# EAGLE board D&N_Electronics_Design_v29 (EAGLE 9.7.0)
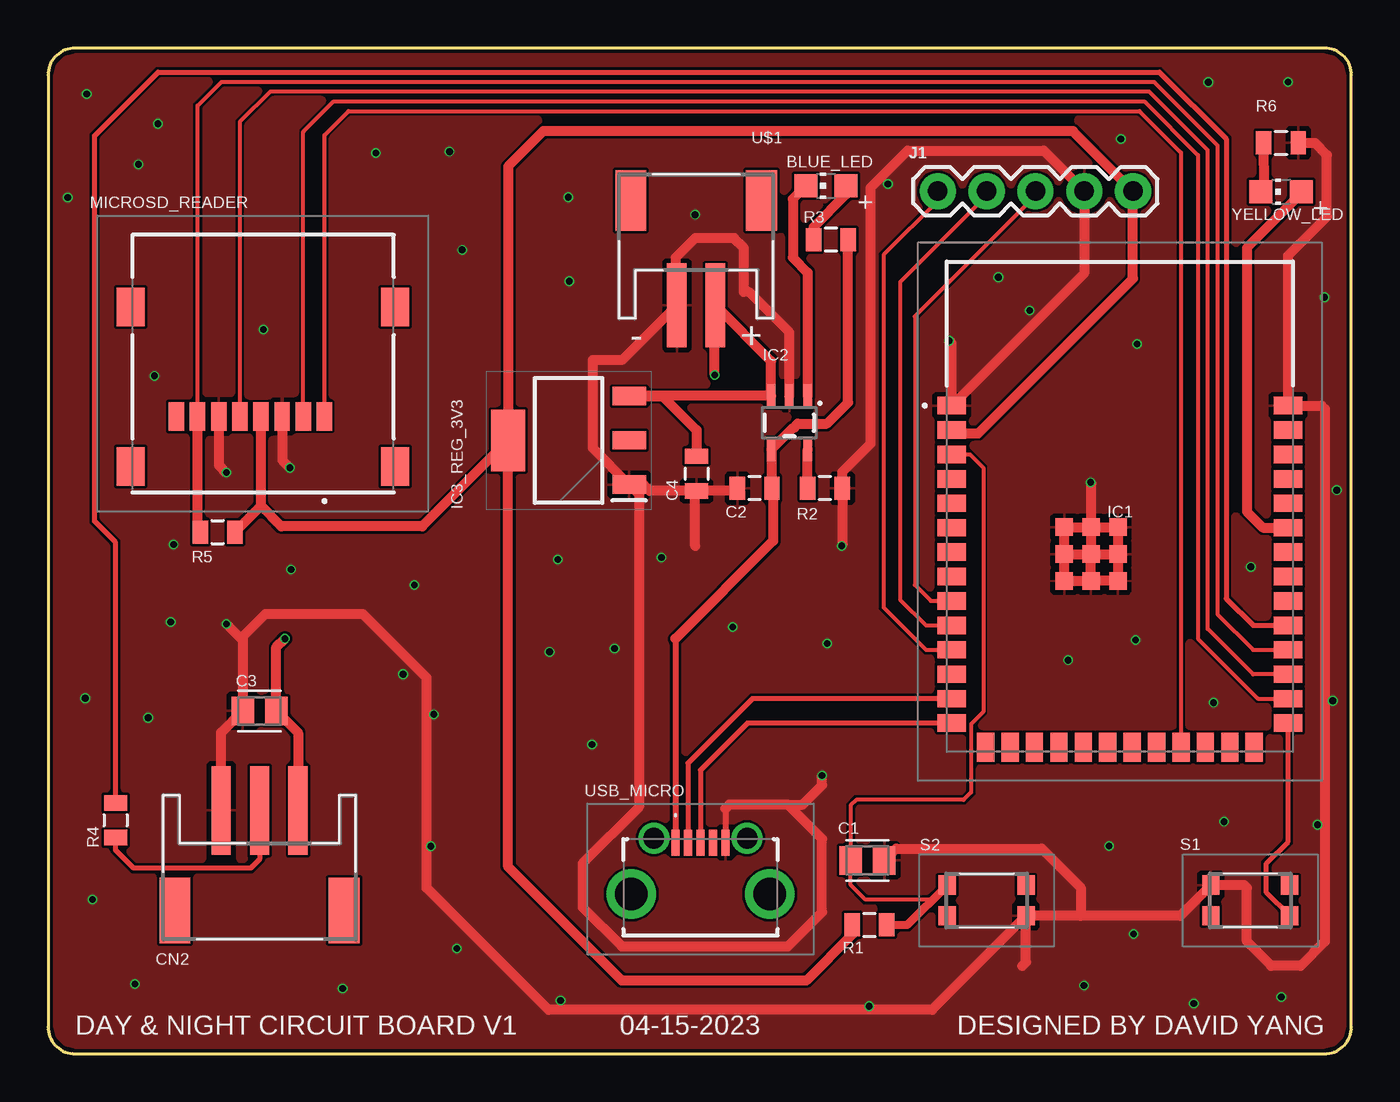
[diagram p0: board, top side]
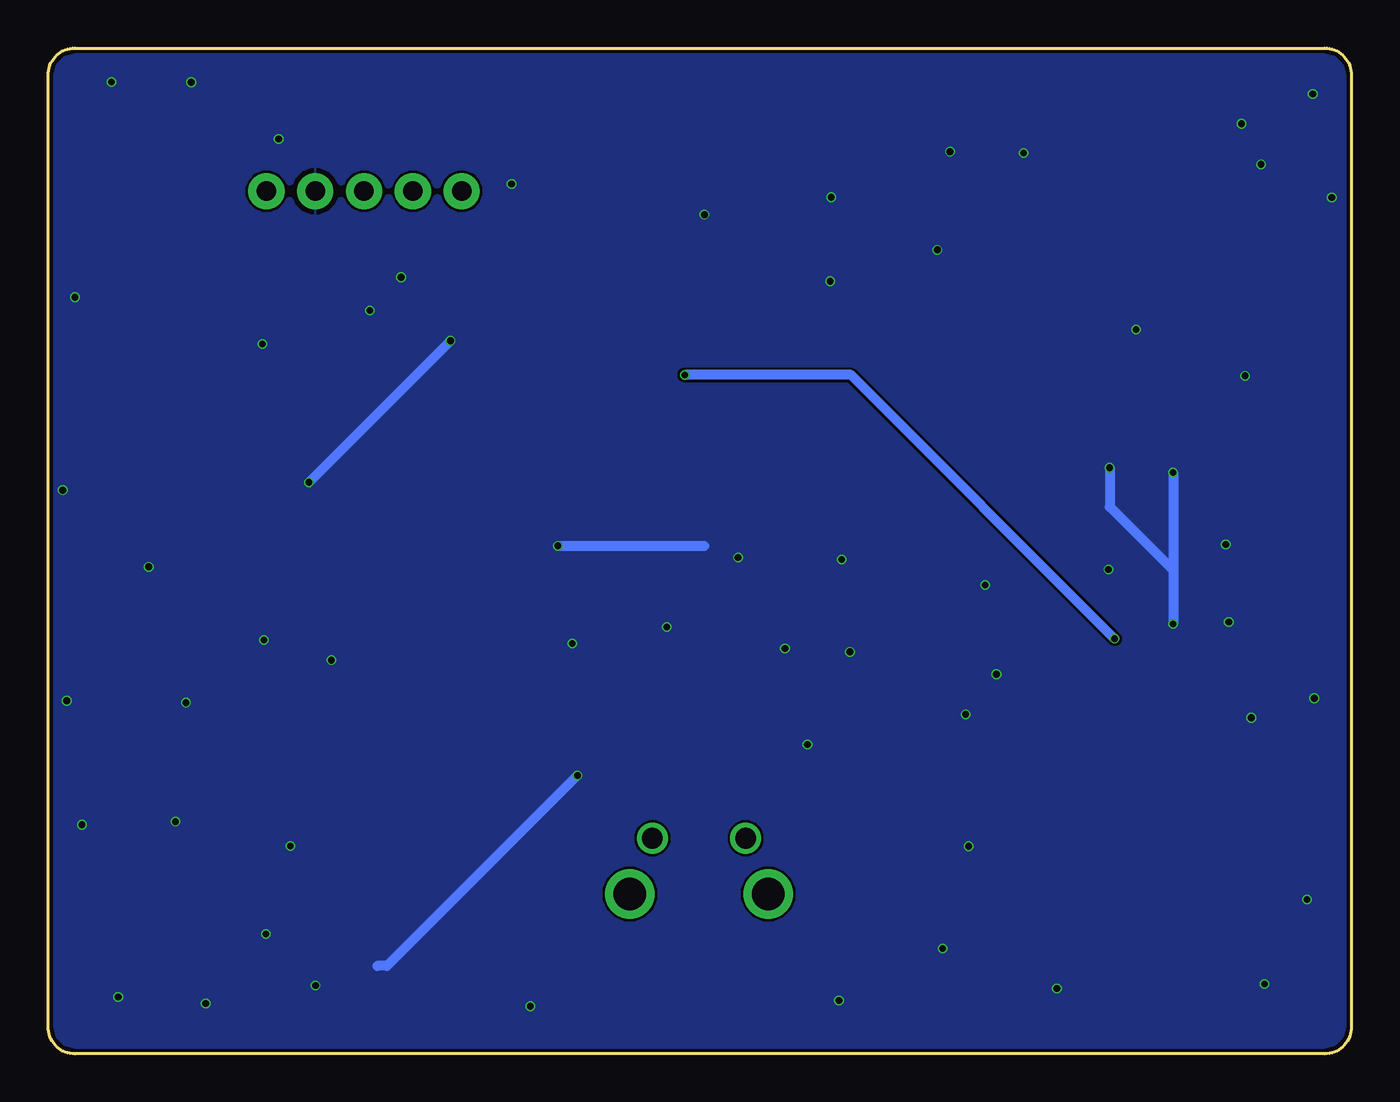
[diagram p1: board, bottom side, seen from below]

Size 67.8 x 52.3 mm. Coordinates in mm from the lower left corner, seen from the top.
Outline: 1.4,0 66.4,0 arc90 67.8,1.4 67.8,50.9 arc90 66.4,52.3 1.4,52.3 arc90 0,50.9 0,1.4 arc90 1.4,0
Copper layers (1*16): Top / Bottom
Stack-up Default Layer Stack: Top User Defined 0.035mm / Dielectric-1 User Defined 1.6mm / Bottom User Defined 0.035mm
Design rules "jlcpcb-2layers *": minimum track width 5mil, minimum drill 0.3mm, track to track 5mil, track to pad 5mil, pad to pad 5mil, via to via 5mil, smd to smd 5mil, copper to edge 0.2mm, drill to drill 6mil, minimum pad ring 10mil, minimum via ring 3mil, stop-mask expansion 4mil, vias tented up to drill 0mil, thermal gap 10mil

## Footprints (pad centres in the part's own frame; a part is rotated, then mirrored left to right if it is on the bottom)
CHIP-LED0805 = smd 1.2 x 1.2: A 0,-1.05; C 0,1.05
CAPC2012X110 = smd 1.165 x 1.465: 1 -0.875,0; 2 0.875,0
0805 = smd 0.8 x 1.2: 1 -0.9,0; 2 0.9,0
JSTPH3 = smd 1 x 4.6: 1 -2,-2.7; 2 0,-2.7; 3 2,-2.7 | smd 1.6 x 3.4: NC1 -4.4,2.5; NC2 4.4,2.5
ESP32S3WROOM1N8R8 = smd 1.5 x 0.9: 1 -8.75,5.26; 2 -8.75,3.99; 3 -8.75,2.72; 4 -8.75,1.45; 5 -8.75,0.18; 6 -8.75,-1.09; 7 -8.75,-2.36; 8 -8.75,-3.63; 9 -8.75,-4.9; 10 -8.75,-6.17; 11 -8.75,-7.44; 12 -8.75,-8.71; 13 -8.75,-9.98; 14 -8.75,-11.25; 27 8.75,-11.25; 28 8.75,-9.98; 29 8.75,-8.71; 30 8.75,-7.44; 31 8.75,-6.17; 32 8.75,-4.9; 33 8.75,-3.63; 34 8.75,-2.36; 35 8.75,-1.09; 36 8.75,0.18; 37 8.75,1.45; 38 8.75,2.72; 39 8.75,3.99; 40 8.75,5.26 | smd 0.9 x 1.5: 15 -6.985,-12.5; 16 -5.715,-12.5; 17 -4.445,-12.5; 18 -3.175,-12.5; 19 -1.905,-12.5; 20 -0.635,-12.5; 21 0.635,-12.5; 22 1.905,-12.5; 23 3.175,-12.5; 24 4.445,-12.5; 25 5.715,-12.5; 26 6.985,-12.5 | smd 0.9 x 0.9: 41 -1.5,-2.46; 42 -1.5,-1.06; 43 -2.9,-1.06; 44 -2.9,-2.46; 45 -2.9,-3.86; 46 -1.5,-3.86; 47 -0.1,-3.86; 48 -0.1,-2.46; 49 -0.1,-1.06
SOT23-5 = smd 0.45 x 1.2: 1 -0.95,-1.4; 2 0,-1.4; 3 0.95,-1.4; 4 0.95,1.4; 5 -0.95,1.4
SOT230P700X180-4N = smd 1.75 x 0.95: 1 -3.15,2.3; 2 -3.15,0; 3 -3.15,-2.3 | smd 1.75 x 3.2: 4 3.15,0
1X05 = drill 1.016 pad 1.88: 1 0,0; 2 2.54,0; 3 5.08,0; 4 7.62,0; 5 10.16,0
HYC39TF08180 = smd 0.8 x 1.5: 1 3.2,-2.75; 2 2.1,-2.75; 3 1,-2.75; 4 -0.1,-2.75; 5 -1.2,-2.75; 6 -2.3,-2.75; 7 -3.4,-2.75; 8 -4.5,-2.75 | smd 1.45 x 2: MP1 -6.875,2.95; MP2 -6.875,-5.35; MP3 6.875,-5.35; MP4 6.875,2.95
KMR221NGLFS = smd 0.9 x 1: 1 -2.05,-0.8; 2 2.05,-0.8; 3 2.05,0.8; 4 -2.05,0.8
JST-PH-2-SMT-RA = smd 1 x 4.35: 1 1,-3.825; 2 -1,-3.825 | smd 1.6 x 3.15: NC1 -3.4,1.625; NC2 3.4,1.625
U254051T4BHJ25F2S = smd 0.4 x 1.35: 1 -1.3,2.325; 2 -0.65,2.325; 3 0,2.325; 4 0.65,2.325; 5 1.3,2.325 | drill 1.07 pad 1.605: MH1 -2.425,2.55; MH2 2.425,2.55 | drill 1.71 pad 2.565: MH3 -3.6,-0.35; MH4 3.6,-0.35

## Placement (x,y rotation side)
BLUE_LED  3.3V  [CHIP-LED0805]  40.47,45.14 90 top
C1  1uf  [CAPC2012X110]  42.62,10.06 0 top
C2  4.7uF  [0805]  36.76,29.41 180 top
C3  0.1uf  [CAPC2012X110]  11,17.83 180 top
C4  4.7uF  [0805]  33.73,30.18 270 top
CN2  [JSTPH3]  11,9.96 180 top
IC1  ESP32-S3-WROOM-1-N8R8  [ESP32S3WROOM1N8R8]  55.76,28.45 0 top
IC2  IC_LIPO_CHARGER  [SOT23-5]  38.56,32.82 180 top
IC3_REG_3V3  LM1117IMPX-3.3  [SOT230P700X180-4N]  27.08,31.9 180 top
J1  [1X05]  56.44,44.86 180 top
MICROSD_READER  HYC39-TF08-180  [HYC39TF08180]  11.18,35.89 0 top
R1  10K  [0805]  42.73,6.71 0 top
R2  2.0k  [0805]  40.41,29.41 180 top
R3  220 Ohm  [0805]  40.72,42.34 180 top
R4  470 ohm  [0805]  3.51,12.14 270 top
R5  10K  [0805]  8.82,27.13 0 top
R6  220 Ohm  [0805]  64.14,47.37 0 top
S1  KMR221NGLFS  [KMR221NGLFS]  62.54,7.98 180 top
S2  KMR221NGLFS  [KMR221NGLFS]  48.82,7.98 0 top
U$1  CONN_BATTERY-LIPO-HORIZ  [JST-PH-2-SMT-RA]  33.71,42.75 0 top
USB_MICRO  U254-051T-4BHJ25-F2S  [U254051T4BHJ25F2S]  33.94,8.66 0 top
YELLOW_LED  3.3V  [CHIP-LED0805]  64.14,44.83 90 top

## Library data of the parts
BLUE_LED C2 C4 IC2 R1-R6 U$1 YELLOW_LED = homemade-hardware
C1 C3 = Capacitor; CATEGORY: Capacitor
CN2 = adafruit
IC1 = ESP32-S3-WROOM-1-N8R8; DESCRIPTION: WiFi Modules - 802.11 (Engineering Samples Only) SMD Module, ESP32-S3R8 with 8 MB Octal PSRAM Die, 8 MB Quad SPI flash, PCB Antenna; HEIGHT: 3.25mm; MANUFACTURER_NAME: Espressif Systems; MANUFACTURER_PART_NUMBER: ESP32-S3-WROOM-1-N8R8; MOUSER_PART_NUMBER: 356-EP32S3WROOM1N8R8; MOUSER_PRICE-STOCK: https://www.mouser.co.uk/ProductDetail/Espressif-Systems/ESP32-S3-WROOM-1-N8R8?qs=7D1LtPJG0i3%2F28hKFavOpQ%3D%3D
IC3_REG_3V3 = LM1117IMPX-3.3; DESCRIPTION: LDO Voltage Regulators 800mA Low-Dropout Linear Regulator 4-SOT-223 -40 to 125; HEIGHT: 1.8mm; MANUFACTURER_NAME: Texas Instruments; MANUFACTURER_PART_NUMBER: LM1117IMPX-3.3; MOUSER_PART_NUMBER: 926-LM1117IMPX-33; MOUSER_PRICE-STOCK: https://www.mouser.co.uk/ProductDetail/Texas-Instruments/LM1117IMPX-3.3?qs=X1J7HmVL2ZHKy9AnitIdMQ%3D%3D
J1 = SparkFun-Connectors
MICROSD_READER = HYC39-TF08-180; DESCRIPTION: Connector SIM CardSD Memory Card 8 SMD Card Sockets Connectors ROHS; HEIGHT: 2.1mm; MANUFACTURER_NAME: HOAUC; MANUFACTURER_PART_NUMBER: HYC39-TF08-180
S1 S2 = KMR221NGLFS; DESCRIPTION: KMR221NGLFS (Tactile Switches); HEIGHT: 1.9mm; MANUFACTURER_NAME: C & K COMPONENTS; MANUFACTURER_PART_NUMBER: KMR221NGLFS; MOUSER_PART_NUMBER: 611-KMR221NGLFS; MOUSER_PRICE-STOCK: https://www.mouser.co.uk/ProductDetail/CK/KMR221NGLFS?qs=sb%252But3Lm4x2H4qewmcuXNA%3D%3D
USB_MICRO = U254-051T-4BHJ25-F2S; DESCRIPTION: MICRO USB connector 7.2 pitch Calf-horn tin plated flat port inserts stainless steel housing; HEIGHT: 3.1mm; MANUFACTURER_NAME: XKB Connectivity; MANUFACTURER_PART_NUMBER: U254-051T-4BHJ25-F2S

## Nets
3V3 [power]: IC1.2 IC3_REG_3V3.4 J1.1 MICROSD_READER.4 R1.1 R5.2
AUDIO_DIN: IC1.9 J1.3
BCLK_TX: IC1.10 J1.4
CS: IC1.23 MICROSD_READER.1
D+: IC1.14 USB_MICRO.3
D-: IC1.13 USB_MICRO.2
GND: C1.2 C2.2 C3.2 C4.2 CN2.3 IC1.1 IC1.40 IC1.41 IC1.42 IC1.43 IC1.44 IC1.45 IC1.46 IC1.47 IC1.48 IC1.49 IC2.2 IC3_REG_3V3.1 J1.2 MICROSD_READER.3 MICROSD_READER.6 R2.1 R6.2 S1.2 S2.2 U$1.2 USB_MICRO.5
GPIO0_BOOT: IC1.27 S1.4
GPIO1: IC1.39
GPIO2: IC1.38
GPIO3: IC1.15
GPIO4: IC1.4
GPIO5: IC1.5
GPIO6: IC1.6
GPIO7: IC1.7
GPIO8: IC1.12
GPIO9: IC1.17
GPIO10: IC1.18
GPIO11: IC1.19
GPIO12: IC1.20
GPIO13: IC1.21
GPIO14: IC1.22
GPIO15: IC1.8
GPIO38: IC1.31 R4.1
GPIO39: IC1.32
GPIO40: IC1.33
GPIO41: IC1.34
GPIO42: IC1.35 YELLOW_LED.A
GPIO45: IC1.26
GPIO46: IC1.16
GPIO47: IC1.24
GPIO48: IC1.25
LRC_RX: IC1.11 J1.5
MISO: IC1.30 MICROSD_READER.7 R5.1
MOSI: IC1.28 MICROSD_READER.2
N$2: R6.1 YELLOW_LED.C
N$3: IC2.5 R2.2
N$4: BLUE_LED.A R3.2
N$5: BLUE_LED.C IC2.1
NEO_DATA: CN2.2 R4.2
RESET: C1.1 IC1.3 R1.2 S2.4
SCK: IC1.29 MICROSD_READER.5
U0RXD: IC1.36
U0TXD: IC1.37
VBAT [power]: C3.1 C4.1 CN2.1 IC2.3 IC3_REG_3V3.3 U$1.1
VBUS [power]: C2.1 IC2.4 R3.1 USB_MICRO.1

## Tracks (layer width: path | path; a pad name or v marks a point on that pad's centre or on a via)
3V3
  Top 0.508: 11.08,28.49 MICROSD_READER.4 | 11.08,28.49 R5.2 | IC3_REG_3V3.4 19.46,27.43 12.14,27.43 11.08,28.49 | IC3_REG_3V3.4 23.93,9.73 29.85,3.81 39.44,3.81 41.83,6.2 R1.1 | IC1.2 47.19,32.26 48.39,32.26 56.44,40.31 J1.1 53.32,47.98 25.76,47.98 23.93,46.15 IC3_REG_3V3.4
AUDIO_DIN
  Top 0.203: J1.3 51.36,44.63 45.09,38.35 45.09,24.38 45.92,23.55 IC1.9
BCLK_TX
  Top 0.203: J1.4 48.82,44.63 44.33,40.13 44.33,23.62 45.67,22.28 IC1.10
CS
  Top 0.203: MICROSD_READER.1 14.38,47.78 15.62,49.02 56.77,49.02 58.93,46.86 IC1.23
D+
  Top 0.254: IC1.14 36.38,17.2 33.94,14.76 USB_MICRO.3
D-
  Top 0.254: IC1.13 36.63,18.47 33.29,15.12 USB_MICRO.2
GND  (via drill 0.35)
  Top 0.305: 35.24,12.76 USB_MICRO.5
  Top 0.508: C4.2 31.31,29.27 30.98,29.6 IC3_REG_3V3.1 | C4.2 35.72,29.27 C2.2 | CN2.3 9,16.71 C3.2 | IC3_REG_3V3.1 30.74,29.09 30.74,12.83 27.82,9.91 27.82,7.62 29.85,5.59 38.48,5.59 40.26,7.37 40.26,11.18 38.48,12.95 | 38.48,12.95 35.44,12.95 35.24,12.76 | 53.72,7.18 58.89,7.18 S1.2 62.22,8.78 62.36,8.64 62.36,5.84 63.63,4.57 65.15,4.57 66.42,5.84 66.42,33.53 66.24,33.71 IC1.40 64.51,41.52 66.53,43.54 66.53,46.74 65.9,47.37 R6.2 | 53.72,7.18 S2.2 | IC3_REG_3V3.1 28.32,31.51 28.32,36.07 29.85,36.07 U$1.2 32.64,38.99 32.64,41.4 33.66,42.42 35.69,42.42 36.2,41.91 36.2,39.62 36.45,39.62 38.56,37.52 IC2.2 | IC1.42 IC1.43 IC1.44 | IC1.42 IC1.49 IC1.48 | IC1.48 IC1.47 IC1.46 54.23,24.59 | 54.23,24.59 IC1.45 IC1.44 | IC1.44 IC1.41 | IC1.42 IC1.41 | IC1.41 54.23,25.96 54.23,24.59 | IC1.41 IC1.48 | S2.2 45.98,2.29 26.04,2.29 19.69,8.64 19.69,19.56 16.39,22.86 11.31,22.86 10.13,21.68 C3.2 | v46.87,37.08 47.01,36.94 IC1.1 53.9,40.6 J1.2 51.79,46.97 44.71,46.97 42.8,45.06 42.8,31.75 41.31,30.26 R2.1 41.31,26.45 v41.28,26.42 | v54.23,29.72 54.26,29.69 IC1.42 | MICROSD_READER.6 8.88,30.62 v9.27,30.23 | v9.27,22.35 10.13,21.5 C3.2 | MICROSD_READER.3 12.18,30.88 v12.58,30.48 | 33.66,26.42 33.66,29.2 C4.2 | C1.2 44.11,10.67 51.69,10.67 53.72,8.64 53.72,7.18 | 38.48,12.95 39.25,12.95 40.26,13.97 v40.26,14.48 | 50.68,4.57 50.87,4.77 S2.2
  Bottom 0.508: v46.87,37.08 v54.23,29.72 | v9.27,30.23 9.27,25.15 | 9.27,25.15 v9.27,22.35 | v12.58,30.48 12.58,28.45 9.27,25.15 | v41.28,26.42 33.66,26.42 | v40.26,14.48 50.17,4.57 50.68,4.57
  other vias: 4.52,3.63 15.32,3.4 21.26,5.48 26.66,2.78 42.72,2.47 59.6,2.62 64.15,2.96 66.04,11.91 55.2,10.81 53.89,3.55 56.47,6.24 60.63,18.26 62.56,25.32 56.64,36.91 51.06,38.66 49.43,40.39 64.5,50.54 60.35,50.52 55.81,47.57 27.06,44.55 20.88,46.91 2.01,49.91 4.7,46.25 5.72,48.36 11.2,37.67 5.54,35.26 6.53,26.49 6.38,22.45 18.47,19.74 19.05,24.38 12.64,25.18 5.21,17.48 20.07,17.65 26.52,25.7 31.91,25.81 29.47,21.08 26.09,20.9 28.3,16.09 27.11,40.17 21.54,41.81 17.05,46.84 33.66,43.64 35.61,22.2 40.53,21.34 43.69,45.24 53.06,20.47 56.57,21.51 66.4,39.34 67.03,29.31 66.83,18.36 61.17,12.07 19.92,10.79 2.31,8.03 1.93,18.49 1.02,44.53
  pour Top: -11.3,63.5 -11.3,-12.7 77.6,-12.7 77.6,63.5
  pour Bottom: -11.3,63.5 -11.3,-12.7 77.6,-12.7 77.6,63.5
GPIO0_BOOT
  Top 0.254: IC1.27 64.51,11.04 63.38,9.91 63.38,8.39 S1.4
GPIO38
  Top 0.254: R4.1 3.51,26.59 2.42,27.69 2.42,47.75 5.72,51.05 57.81,51.05 61.29,47.58 61.29,23.68 62.69,22.28 IC1.31
GPIO42
  Top 0.508: IC1.35 63.2,27.36 62.36,28.19 62.36,41.91 65.19,44.74 YELLOW_LED.A
LRC_RX
  Top 0.203: IC1.11 45.67,21.01 43.46,23.22 43.46,41.55 46.28,44.37 J1.5
MISO
  Top 0.203: MICROSD_READER.7 7.78,49.3 9.02,50.55 57.53,50.55 60.84,47.24 60.84,22.86 62.69,21.01 IC1.30
  Top 0.508: MICROSD_READER.7 7.78,27.27 R5.1
MOSI
  Top 0.203: MICROSD_READER.2 13.28,47.95 14.86,49.53 57.03,49.53 59.82,46.74 59.82,21.59 62.94,18.47 IC1.28
N$2
  Top 0.508: R6.1 63.27,45.01 YELLOW_LED.C
N$3
  Top 0.508: IC2.5 R2.2
N$4
  Top 0.508: BLUE_LED.A 41.52,44.69 39.82,42.99 R3.2
N$5
  Top 0.508: IC2.1 39.51,40.63 38.74,41.4 38.74,44.46 BLUE_LED.C
NEO_DATA
  Top 0.254: CN2.2 11,10.11 10.54,9.65 4.45,9.65 3.51,10.59 R4.2
RESET
  Top 0.203: IC1.3 47.96,31.17 48.64,30.48 48.64,17.78 48.01,17.15 48.01,13.59 47.63,13.21 42.04,13.21 41.75,12.92 C1.1 41.75,8.79 42.52,8.01 46.01,8.01 S2.4
  Top 0.406: S2.4 44.7,6.71 R1.2
SCK
  Top 0.203: IC1.29 62.69,19.74 60.33,22.1 60.33,46.99 57.28,50.04 11.56,50.04 9.98,48.46 MICROSD_READER.5
VBAT  (via drill 0.35)
  Top 0.508: C4.1 33.73,32.44 31.97,34.2 IC3_REG_3V3.3 30.24,34.22 IC2.3 37.61,36.02 U$1.1 34.67,38.89 v34.67,35.31 | CN2.1 13,16.71 C3.1 11.88,21.14 v12.32,21.59
  Bottom 0.508: v12.32,21.59 26.04,35.31 v34.67,35.31
VBUS
  Top 0.305: 32.64,21.59 USB_MICRO.1
  Top 0.508: 32.64,21.59 37.72,26.67 37.72,29.35 C2.1 37.66,31.37 IC2.4 38.71,32.51 38.74,32.51 38.99,32.77 40.52,32.77 41.62,33.87 R3.1

## Text on the board
tNames: DAY & NIGHT CIRCUIT BOARD V1 | 04-15-2023 | DESIGNED BY DAVID YANG